# Altium PCB OLD.PcbDoc
Units mm, origin at the board's own origin, x right, y up, seen from the top; angles counter-clockwise.
Board outline 63.6 x 52 mm, 2 copper layers (Top Layer, Bottom Layer); 49 components, 32 nets, 177 pads, 32 vias.
Unrouted connection lines stored in the file: 47.
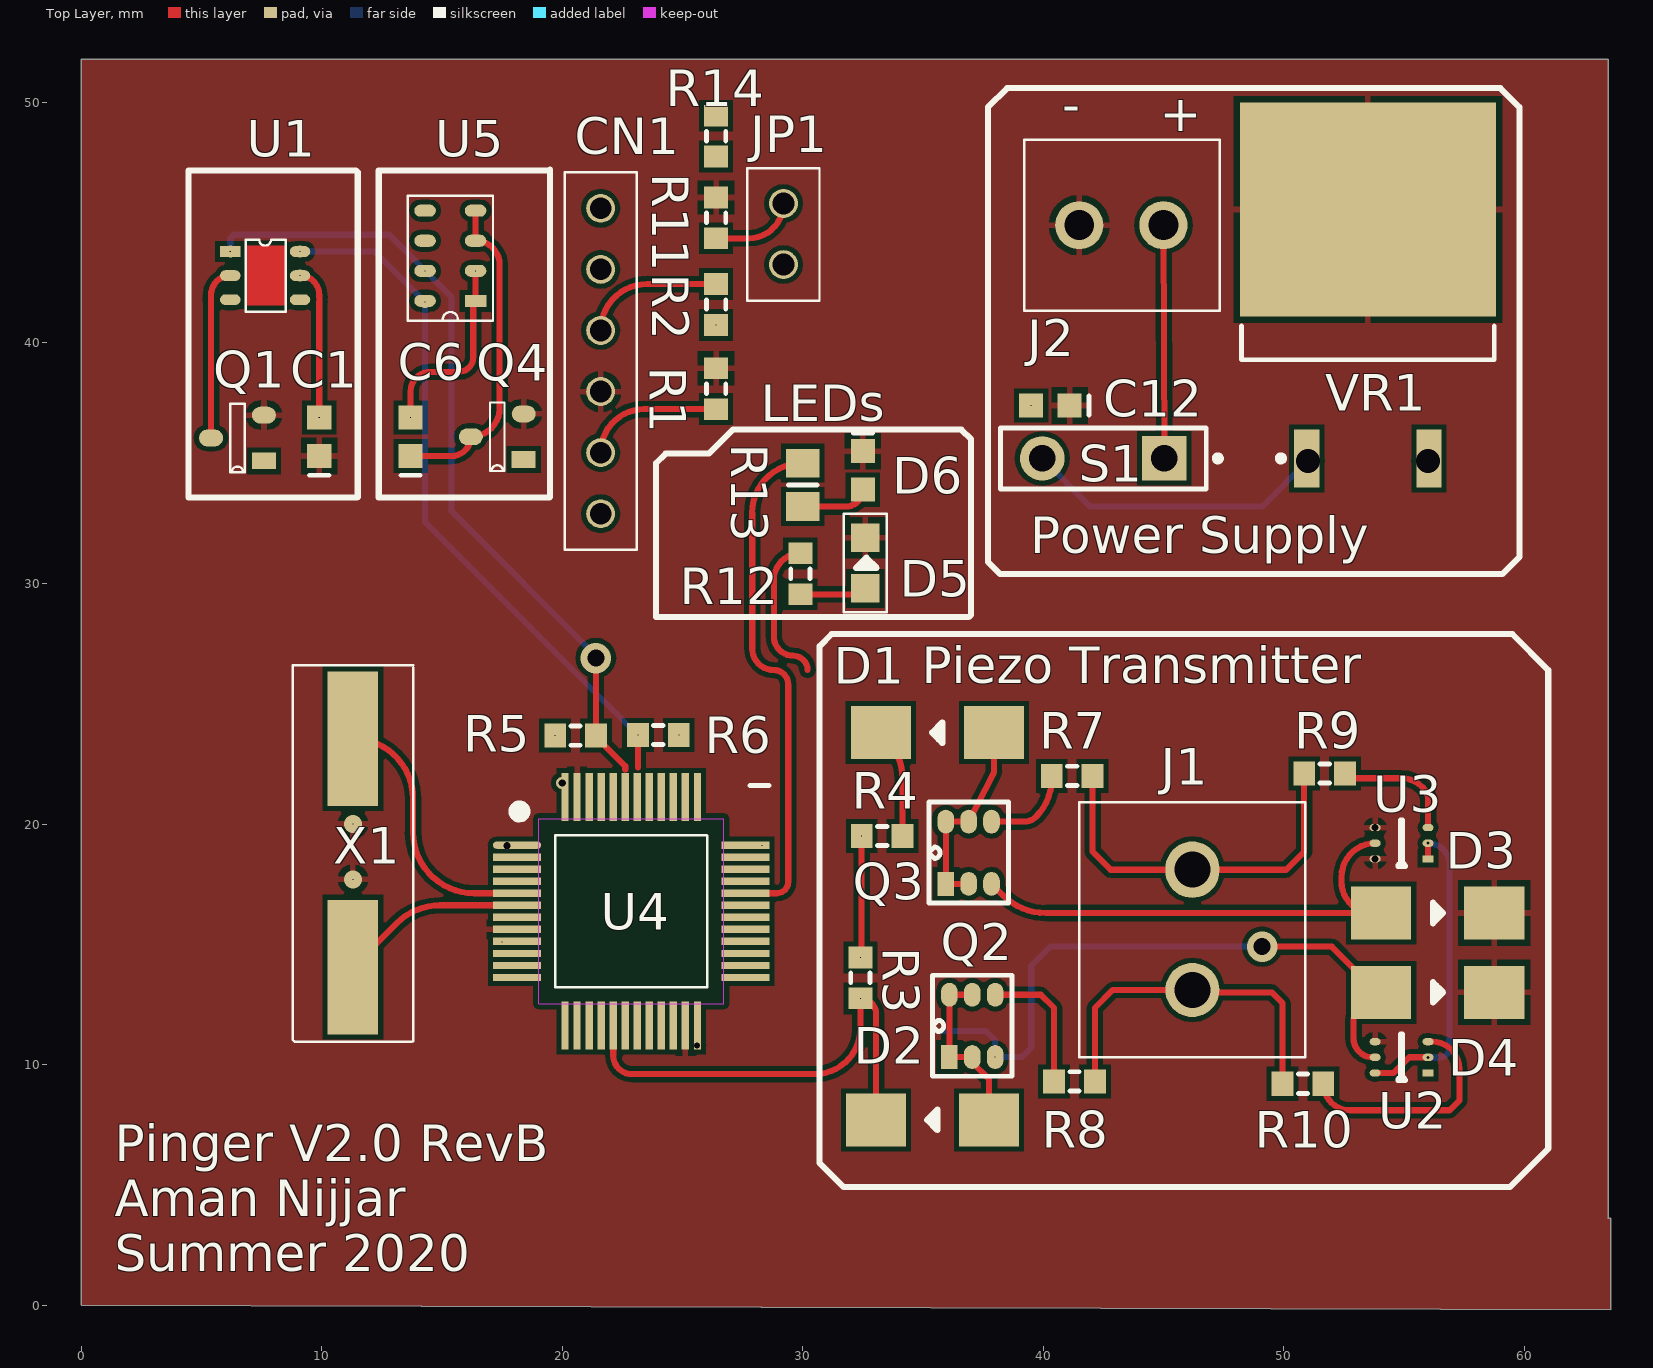
[diagram p0: Top Layer view]
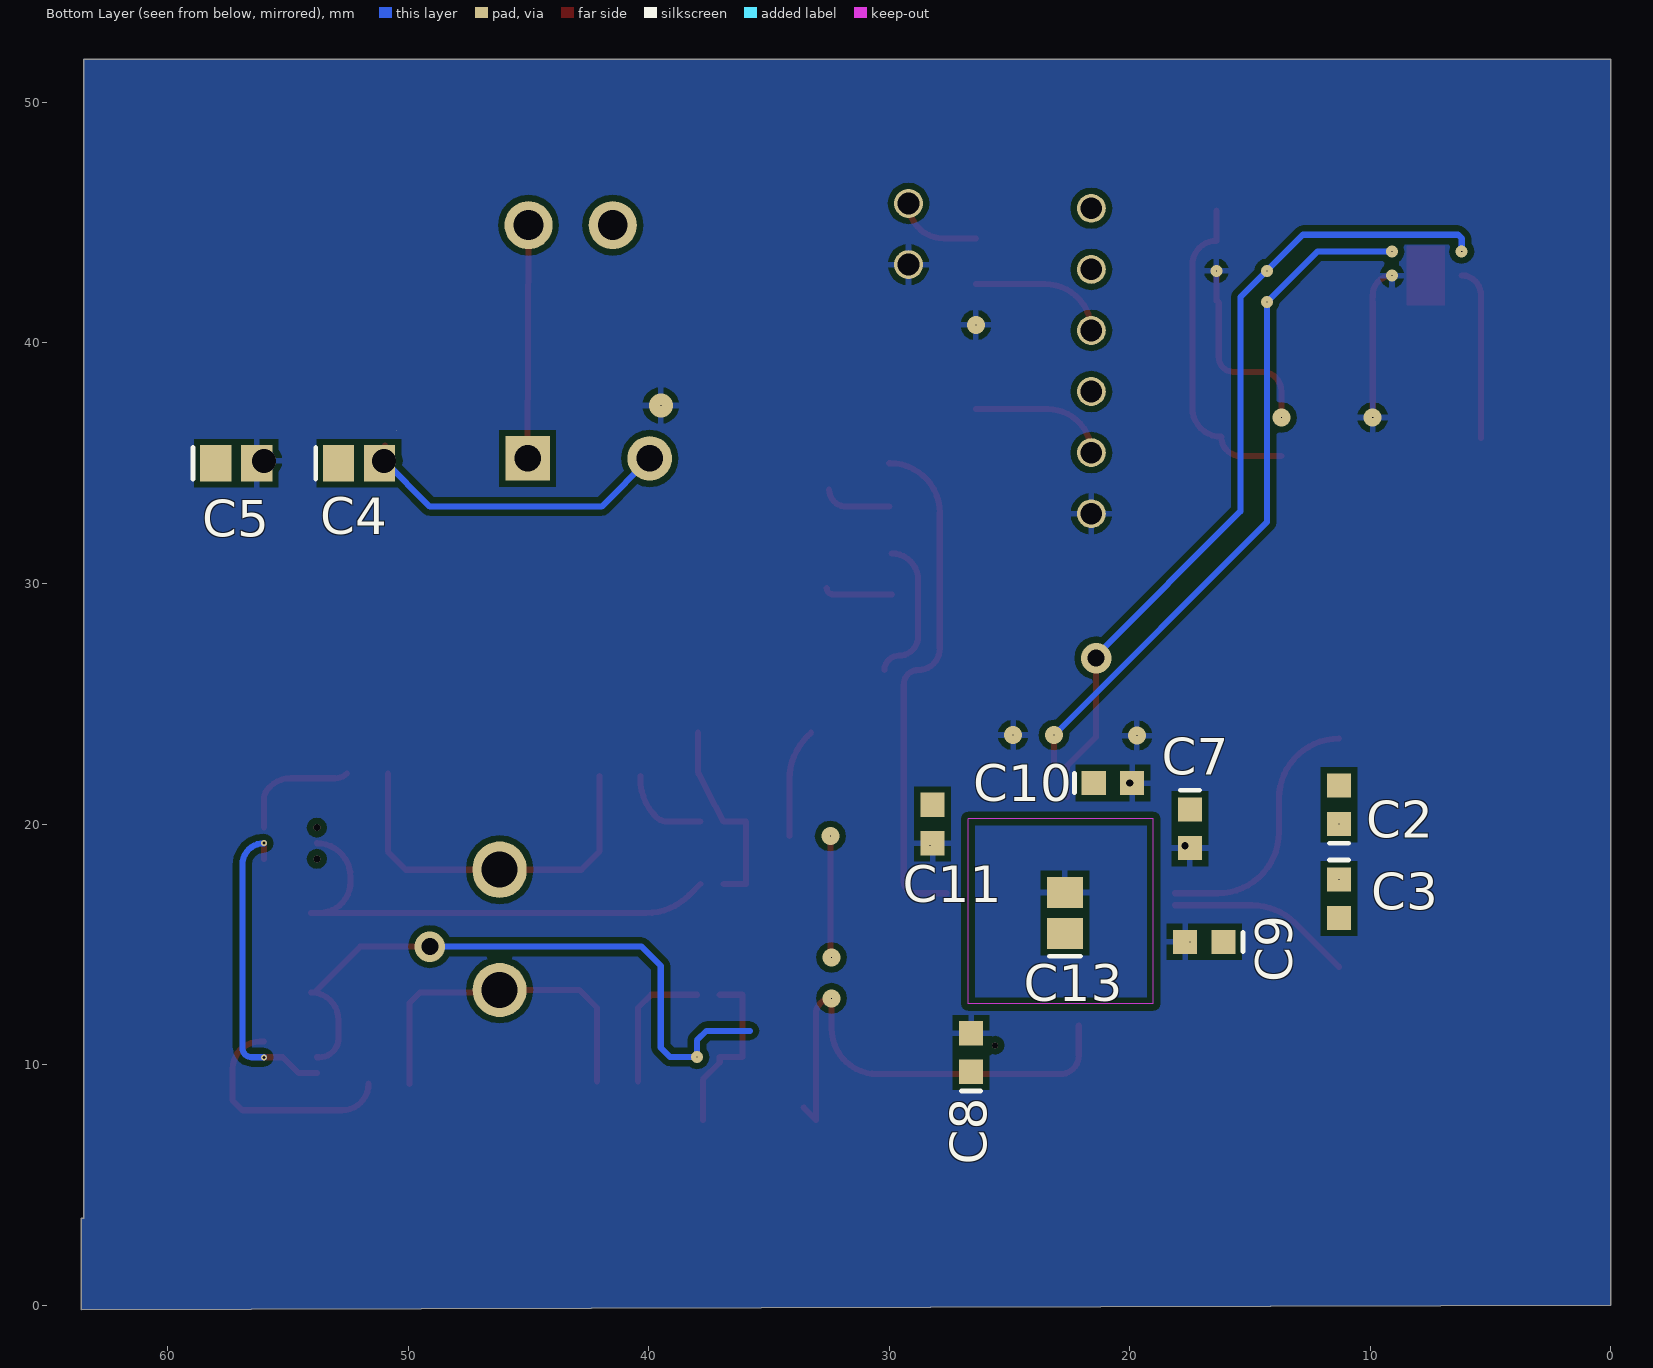
[diagram p1: Bottom Layer view, seen from below]
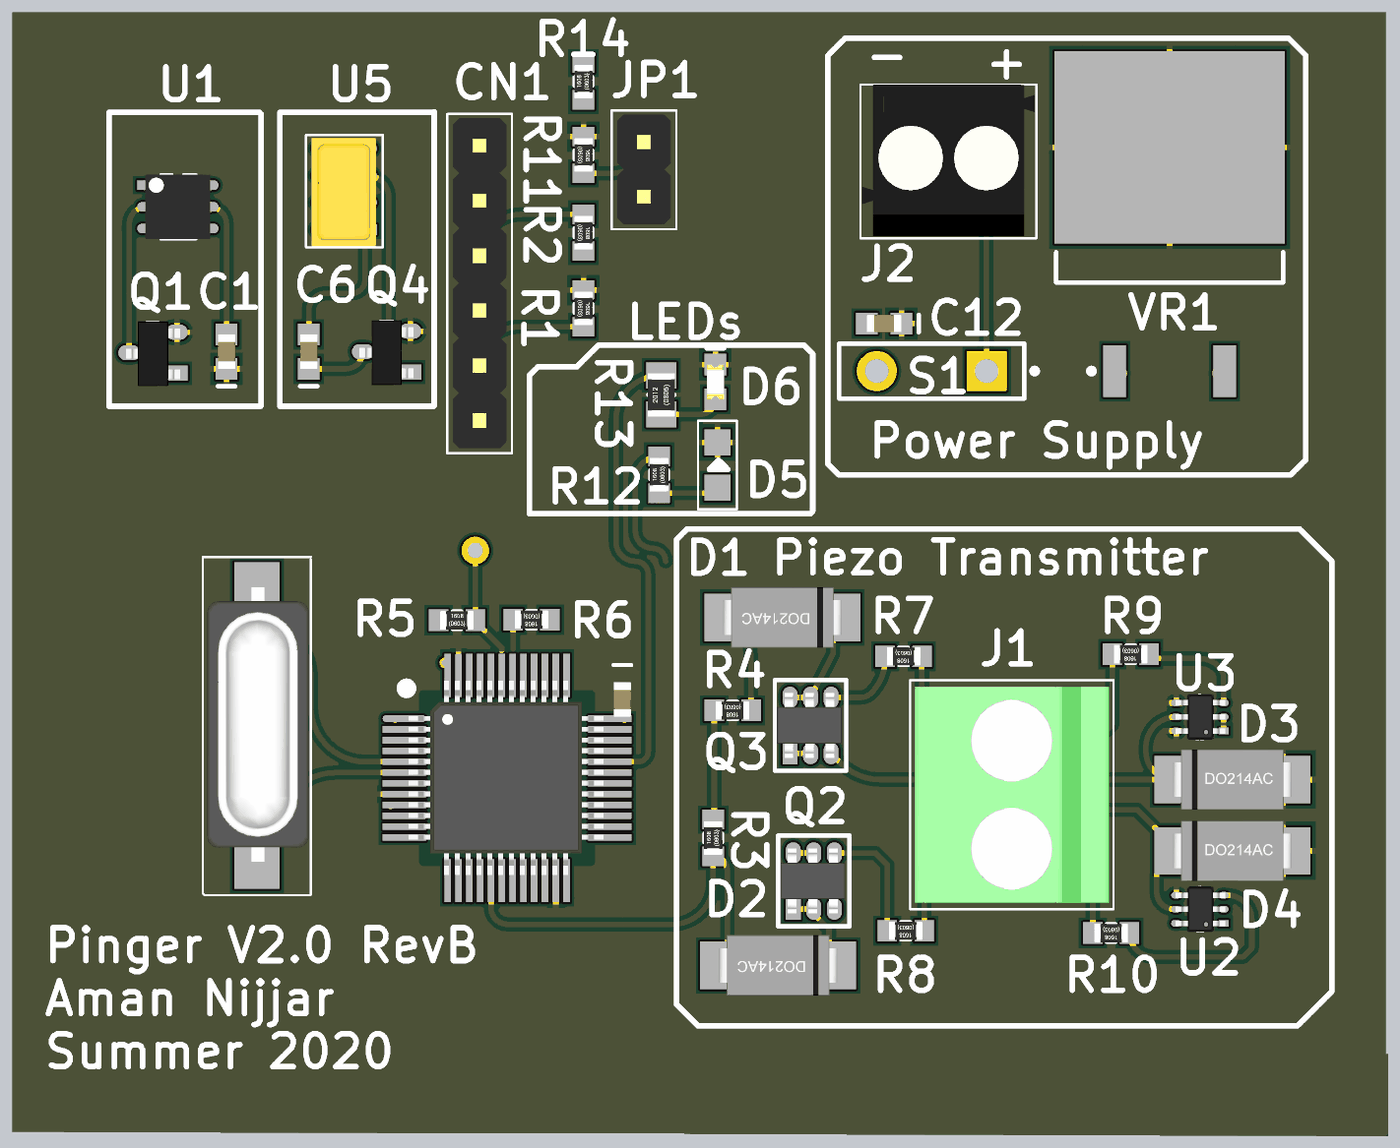
[diagram p2: 3D render of the assembled board from above, using the file's embedded part models]
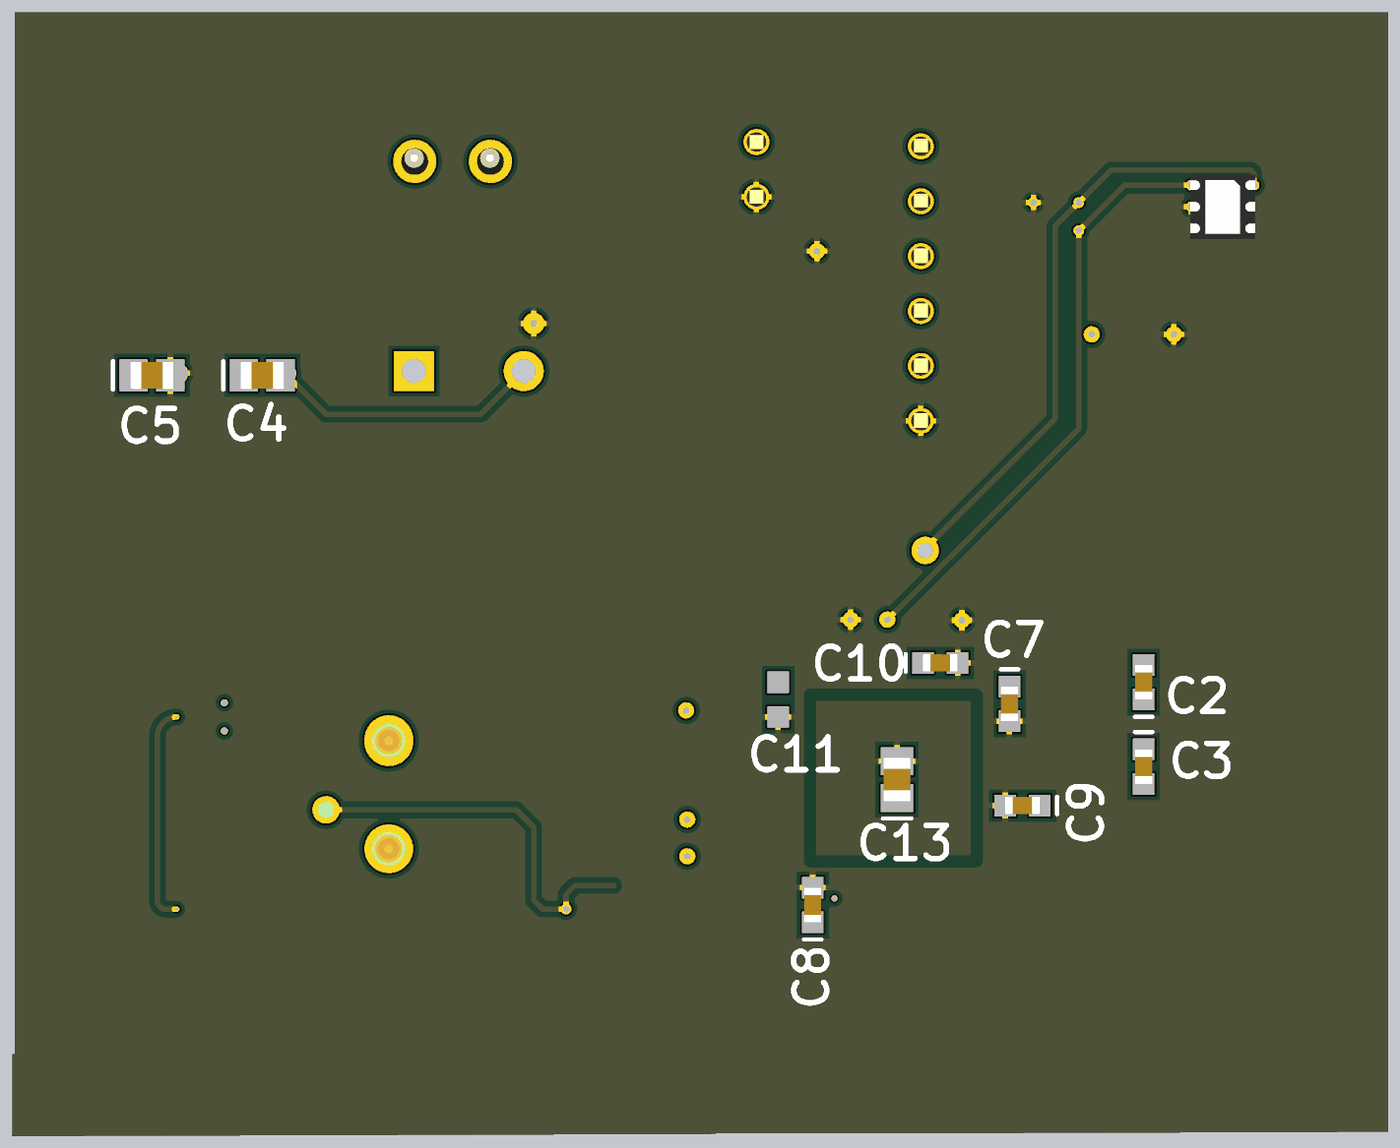
[diagram p3: 3D render of the assembled board from below, using the file's embedded part models]

## Layer stack, top to bottom
Top Solder: solder mask 0.0102, Solder Resist, Dk 3.5
Top Layer: signal copper 0.0356
Dielectric 1: dielectric 0.32, FR-4, Dk 4.8
Bottom Layer: signal copper 0.0356
Bottom Solder: solder mask 0.0102, Solder Resist, Dk 3.5

## Board outline
0,0 0,51.8 63.5,51.8 63.5,3.6 63.6,3.6 63.6,-0.2

## Design rules (kind name [scope] priority, off if disabled: settings)
Clearance Clearance_1 [OnLayer('Top Layer')] p1: gap=0.2 ignorepadtopadclearanceinfootprint=FALSE
Clearance [All] p2: gap=0.254 ignorepadtopadclearanceinfootprint=FALSE except(0: Arc-Hole Track-Hole SMDPad-Hole THPad-Hole Via-Hole Fill-Hole Poly-Hole Region-Hole Text-Hole)
ComponentClearance [All] p1 off: gap=0.254 collisioncheckmode=3 verticalgap=0.254 showdistances=FALSE
PolygonConnect [All] p1: connectstyle=Relief reliefconductorwidth=0.254 reliefentries=4 polygonreliefangle="90 Angle" airgapwidth=0.254
RoutingVias [All] p1: holewidth=0.711 width=1.27 viastyle="Through Hole" minholewidth=0.711 minwidth=1.27 maxholewidth=0.711 maxwidth=1.27
SolderMaskExpansion [All] p1: expansion=0.102 istentingtop=FALSE
UnRoutedNet [All] p1: checkbadconnections=TRUE
ViasUnderSMD [All] p1: allowed=TRUE
Width [All] p1: maxlimit=0.254 minlimit=0.254 preferedwidth=0.254
28 further rules are at their usual default settings.

## Components (designator, comment, footprint, x,y, rotation, side; value= is the part's Value field where it differs from the comment)
C1 "0.1μF" "CAPC1608N(0603\")" 9.9,36.1 r90 top
C2 "30pF" "CAPC1608N(0603\")" 11.3,20.8 r90 bottom
C3 "30pF" "CAPC1608N(0603\")" 11.3,16.9 r270 bottom
C4 "4.7µF" "CAPC2012N(0805\")" 52.05,35 r180 bottom
C5 "4.7µF" "CAPC2012N(0805\")" 57.15,35 r180 bottom
C6 "0.1μF" "CAPC1608N(0603\")" 13.7,36.1 r90 top
C7 "0.1μF" "CAPC1608N(0603\")" 17.5,19.8 r270 bottom
C8 "0.1μF" "CAPC1608N(0603\")" 26.6,10.5 r90 bottom
C9 "0.1μF" "CAPC1608N(0603\")" 16.9,15.1 r0 bottom
C10 "0.1μF" "CAPC1608N(0603\")" 20.7,21.7 r180 bottom
C11 "0.1μF" "CAPC1608N(0603\")" 28.2,20 r270 bottom
C12 "0.1μF" "CAPC1608N(0603\")" 40.3,37.4 r180 top
C13 "4.7µF" "CAPC2012N(0805\")" 22.7,16.3 r90 bottom
CN1 "Header Male 1x6" "Header, Male, 1X6" 21.6,32.9 r90 top
D1 "SMBJ24CA" DO-214AC 35.6,23.8 r180 top
D2 "SMBJ24CA" DO-214AC 35.4,7.7 r180 top
D3 "SMBJ24CA" DO-214AC 56.4,16.3 r0 top
D4 "SMBJ24CA" DO-214AC 56.4,13 r0 top
D5 "Red" LED0805 32.6,30.85 r90 top
D6 "Blue" LED0603 32.5,34.7 r90 top
J1 "2x1 Term Block" "2X1 Terminal Blocks Phoenix Contact 5mm" 46.2,18.1 r270 top
J2 "2x1 Term Block" "2X1 Terminal Blocks" 41.5,44.9 r0 top
JP1 "1X2 Pin Head" "2X1 Males Header" 29.2,43.26 r90 top
Q1 "BC846B,215" SOT-23 7.5,35.1 r180 top
Q2 "SI3443DV" SuperSOT-6 36.1,10.31 r90 top
Q3 "SI3443DV" SuperSOT-6 35.95,17.51 r90 top
Q4 "BC846B,215" SOT-23 18.3,35.15 r180 top
R1 "10k" "RESC1608N(0603\")" 26.4,38.1 r270 top
R2 "10k" "RESC1608N(0603\")" 26.4,41.6 r270 top
R3 "1k" "RESC1608N(0603\")" 32.4,13.6 r90 top
R4 "1k" "RESC1608N(0603\")" 33.3,19.5 r180 top
R5 "3.32k" "RESC1608N(0603\")" 20.554,23.673 r0 top
R6 "3.32k" "RESC1608N(0603\")" 24,23.7 r180 top
R7 "100" "RESC1608N(0603\")" 41.2,22 r180 top
R8 "100" "RESC1608N(0603\")" 41.3,9.3 r180 top
R9 "100" "RESC1608N(0603\")" 51.7,22.1 r180 top
R10 "100" "RESC1608N(0603\")" 50.8,9.2 r180 top
R11 "10k" "RESC1608N(0603\")" 26.4,45.2 r270 top
R12 "715R" "RESC1608N(0603\")" 29.9,30.4 r90 top
R13 "680" "RESC2012N(0805\")" 30,34.1 r90 top
R14 "10k" "RESC1608N(0603\")" 26.4,48.6 r90 top
S1 "SW-SPST" SPST-2 42.5,35.2 r180 top
U1 "I2C Humidity and Temperature Sensor" QFN-6 6.2,43.8 r0 top
U2 "20V/8V" SOT-363 56,9.65 r180 top
U3 "20V/8V" SOT-363 56,18.55 r180 top
U4 "STM32F091CCT6" STM-48LQFP 22.871,16.371 r270 top
U5 "Pressure Sensor" "TE PRESSURE SENSOR (MS560702BA03-50)" 16.4,41.75 r180 top
VR1 "595-UCC283TDTR-3" D2PAK_N 53.5,42 r90 top
X1 "8MHz" HC49/US 11.3,18.8 r90 top

## Footprints (in the part's own frame and the unit in brackets; to place one, negate y for a bottom-side part, rotate by r counter-clockwise, add the part's x,y. Pads: shape width x height; smd on the part's side, far side on the other; paste and mask are expansions set on the pad)
"2X1 Males Header" [mm]
  round 1.2 hole 0.9: 1(0,0) 2(2.54,0)
  silkscreen extent -1.5,-1.5 4,1.5, body extent -1.27,-1.24 3.81,1.25, height 8.54
"2X1 Terminal Blocks" [mm] "ED2740-ND"
  round 2 hole 1.24: 1(0,0) 2(3.5,0)
  silkscreen extent -2.29,-3.56 5.84,3.56, body extent -2.22,-3.44 5.78,3.56, height 8.4
"2X1 Terminal Blocks Phoenix Contact 5mm" [mm]
  oval 2.35x2.25 hole 1.5: 1(0,0)
  round 2.25 hole 1.5: 2(5,0)
  silkscreen extent -2.8,-4.7 7.8,4.7, body extent -2.5,-4.5 7.5,4.5, height 14.05
"CAPC1608N(0603\")" [mm] "Chip Capacitor, Body 1.6x0.8mm (0603\"), IPC Medium Density"
  rect 1x1 smd: 1(-0.8,0) 2(0.8,0)
  silkscreen extent -1.6,-0.4 -1.6,0.4, body extent -0.8,-0.4 0.8,0.4, height 0.9
"CAPC2012N(0805\")" [mm] "Chip Capacitor, Body 2.0x1.3mm (0805\"), IPC Medium Density"
  rect 1.3x1.5 smd: 1(-0.85,0) 2(0.85,0)
  silkscreen extent -1.8,-0.65 -1.8,0.65, body extent -1,-0.62 1,0.63, height 1
D2PAK_N [mm] "D2-PAK, 4-Leads, Body 8.8x10.4mm, Pitch 2.54mm, Lead Span 15.1mm, IPC Medium Density"
  rect 2.4x1.05 smd: 1(-6.8,2.54) 3(-6.8,-2.54)
  rect 8.9x10.65 smd: 2(3.55,0)
  silkscreen extent -6.92,-5.25 -1.3,5.25, body extent -2.7,-5.28 6.3,5.28, height 4.69
DO-214AC [mm]
  rect 2.5x2.2 smd: 1(-2.35,0) 2(2.35,0)
  silkscreen extent -0.2,-0.43 0.22,0.43, body extent -2.74,-1.4 2.74,1.4, height 2.26
HC49/US [mm]
  rect 5.6x2.1 smd: 1(-4.75,0) 2(4.75,0)
  silkscreen extent -7.85,-2.5 7.8,2.5, body extent -6.3,-2.4 6.4,2.3, height 4.2
"Header, Male, 1X6" [mm]
  round 1.2 hole 0.9: 1(0,0) 2(2.54,0) 3(5.08,0) 4(7.62,0) 5(10.16,0) 6(12.7,0)
  silkscreen extent -1.5,-1.5 14.2,1.5, body extent -1.27,-1.24 14,1.25, height 8.54
LED0603 [mm]
  rect 1x1 smd: 1(0.8,0) 2(-0.8,0)
  silkscreen extent 1.55,-0.4 1.55,0.4, body extent -0.8,-0.4 0.8,0.4, height 0.69
LED0805 [mm]
  rect 1.2x1.2 smd: 1(1.05,0) 2(-1.05,0)
  silkscreen extent -2.05,-0.9 2.05,0.9
QFN-6 [mm]
  rect 0.85x0.45 smd: 1(0,0)
  oval 0.85x0.45 smd: 2(0,-1) 3(0,-2) 4(2.9,-2) 5(2.9,-1) 6(2.9,0)
  Top Layer region: 0.7,-2.25 2.3,-2.25 2.3,0.25 0.7,0.25
  silkscreen extent 0.65,-2.5 2.3,0.5, body extent -0.05,-2.5 2.95,0.5, height 0.05
"RESC1608N(0603\")" [mm] "Chip Resistor, Body 1.6x0.8mm (0603\"), IPC Medium Density"
  rect 0.9x1 smd: 1(-0.85,0) 2(0.85,0)
  silkscreen extent -0.2,-0.4 0.2,0.4, body extent -0.77,-0.42 0.78,0.43, height 0.44
"RESC2012N(0805\")" [mm] "Chip Resistor, Body 2.0x1.3mm (0805\"), IPC Medium Density"
  rect 1.2x1.4 smd: 1(-0.9,0) 2(0.9,0)
  silkscreen extent 0,-0.6 0,0.6, body extent -1,-0.62 1,0.63, height 0.45
SOT-23 [mm]
  rect 1x0.7 smd: 1(-0.1,0)
  oval 1x0.7 smd: 2(-0.1,-1.9) 3(2.1,-0.95)
  silkscreen extent 0.7,-2.37 1.3,0.48, body extent -0.25,-2.4 2.25,0.6, height 1.06
SOT-363 [mm]
  rect 0.45x0.3 smd: 1(0,0)
  oval 0.45x0.3 smd: 2(0,-0.65) 3(0,-1.3) 4(2.2,-1.3) 5(2.2,-0.65) 6(2.2,0)
  silkscreen extent 0.94,-1.63 1.26,0.33, body extent -0.07,-1.7 2.23,0.4, height 1
SPST-2 [mm] "Switch; 2 Leads"
  rect 1.85x1.85 hole 1.1: 1(-2.54,0)
  round 1.85 hole 1.1: 2(2.54,0)
  silkscreen extent -4.89,-1.27 4.28,1.27
STM-48LQFP [mm]
  oval 0.3x2 smd: 1(-2.75,-4.75)
  rect 0.3x2 smd: 2(-2.25,-4.75) 3(-1.75,-4.75) 4(-1.25,-4.75) 5(-0.75,-4.75) 6(-0.25,-4.75) 7(0.25,-4.75) 8(0.75,-4.75) 9(1.25,-4.75) 10(1.75,-4.75) 11(2.25,-4.75) 12(2.75,-4.75) 25(2.75,4.75) 26(2.25,4.75) 27(1.75,4.75) 28(1.25,4.75) 29(0.75,4.75) 30(0.25,4.75) 31(-0.25,4.75) 32(-0.75,4.75) 33(-1.25,4.75) 34(-1.75,4.75) 35(-2.25,4.75) 36(-2.75,4.75)
  rect 2x0.3 smd: 13(4.75,-2.75) 14(4.75,-2.25) 15(4.75,-1.75) 16(4.75,-1.25) 17(4.75,-0.75) 18(4.75,-0.25) 19(4.75,0.25) 20(4.75,0.75) 21(4.75,1.25) 22(4.75,1.75) 23(4.75,2.25) 24(4.75,2.75) 37(-4.75,2.75) 38(-4.75,2.25) 39(-4.75,1.75) 40(-4.75,1.25) 41(-4.75,0.75) 42(-4.75,0.25) 43(-4.75,-0.25) 44(-4.75,-0.75) 45(-4.75,-1.25) 46(-4.75,-1.75) 47(-4.75,-2.25) 48(-4.75,-2.75)
  Keep-Out Layer lines w0.05: 3.85,-3.85 -3.85,-3.85 -3.85,3.85 3.85,3.85 3.85,-3.85
  silkscreen extent -4.36,-4.86 3.16,3.16, body extent -4.51,-4.55 4.49,4.45, height 1.56
SuperSOT-6 [mm]
  rect 0.99x0.69 smd: 1(0,0)
  oval 0.99x0.69 smd: 1(0,-0.95) 1(2.59,-0.95) 1(2.59,0) 3(0,-1.9) 4(2.59,-1.9)
  silkscreen extent -0.8,-2.6 3.4,0.7, body extent -0.2,-2.4 2.8,0.6, height 1.05
"TE PRESSURE SENSOR (MS560702BA03-50)" [mm]
  rect 0.9x0.5 smd: 1(0,0)
  oval 0.9x0.5 smd: 2(0,-1.25) 3(0,-2.5) 4(0,-3.75) 5(2.1,-3.75) 6(2.1,-2.5) 7(2.1,-1.25) 8(2.1,0)
  silkscreen extent -0.72,-4.37 2.83,0.83, body extent -0.42,-4.22 2.58,0.78, height 0.95

## Part data
C1 C6 C7 C8 C9 C10 C11 C12: library part "0.1uF 100V 0603 SMD, Ceramic", "Capacitor, Ceramic, 100V, +/- 10%, 0603 SMD, X7R", Supplier Part Number 1=445-6938-1-ND, Created By="Ashwin Sira", MFG=TDK, MFG#=CGA3E3X7S2A104K080AB, PackageDescription="Chip Capacitor", Published=16-04-26, Publisher=AUVic, Supplier 1=Digi-Key
C2 C3: library part "30pF 50V 0603 SMD, Ceramic", "Capacitor, Ceramic, 50V, +/-1%, 0603 SMD, C0G", Supplier Part Number 1=1276-2259-1-ND, Made By="Andy Bates", PackageDescription="Chip Capacitor", Published=16-09-12, Publisher=AUVic, Supplier 1=Digi-Key
C4 C5 C13: library part "4.7uF 35V 0805 SMD, Ceramic", "Capacitor, Ceramic, 35V, +/- 10%, 0805 SMD, X5R", Supplier Part Number 1=1276-6722-1-ND, Made By="Andy Bates", PackageDescription="Chip Capacitor", Published=16-11-12, Publisher=AUVic, Supplier 1=Digi-Key
CN1: library part "Header, Male, 1x6", "1x6, Pads Pitch: 0.1\" (2.54mm), Through hole", Supplier 1 Part Number=952-2270-ND, Made Bates="Andy Bates", Supplier 1=Digikey
D1 D2 D3 D4: "TVS DIODE 24VWM 38.9VC SMB", Capacitance @ Frequency=-, Current - Peak Pulse (10/1000µs)=15.4A, Manufacturer="Fairchild Semiconductor", Operating Temperature="-55°C ~ 150°C (TJ)", Package / Case="DO-214AA, SMB", Power - Peak Pulse=600W, Power Line Protection=No, Supplier Device Package="DO-214AA (SMB)", Supplier Part Number 1=SMBJ24CAFSCT-ND, Voltage - Breakdown (Min)=26.7V, Voltage - Clamping (Max) @ Ipp=38.9V, Voltage - Reverse Standoff (Typ)=24V, Applications="General Purpose", Bidirectional Channels=1, Category="Circuit Protection", ComponentLink1Description=http://www.fairchildsemi.com/datasheets/SM/SMBJ100A.pdf, ComponentLink1URL=http://www.fairchildsemi.com/datasheets/SM/SMBJ100A.pdf, Manufacturer Part Number=SMBJ24CA, Mounting Type="Surface Mount", Packaging="Cut Tape (CT)", Pricing 1="1=0.58, 10=0.411, 25=0.3372, 100=0.2695, 250=0.19636, 500=0.15946, 1000=0.12257 (USD)", RoHS="RoHS Compliant", Stock 1=31873, Supplier 1=Digi-Key, Type=Zener, Unidirectional Channels=-
D5: library part "LED, 0805 (2012), Green, Clear", "LED, 0805 (2012), Green, Clear", Supplier Part Number 1=475-1410-1-ND, Colour=Red, Created By="Andy Bates", Supplier 1=Digi-Key
D6: library part "LED, 0603 (1608), Blue, Clear", "LED, 0603 (1608), Blue, Clear", Supplier Part Number 1=475-2816-6-ND, Colour=Blue, Created By="Lyden Smith", Date Created=2017-09-19, Supplier 1=Digi-Key
J1: library part "2x1 Terminal Block, 20A, 12-20AWG", Supplier Part Number 1=277-6405-ND, Date Made=2017-11-14, Made By="Andy Bates", Supplier 1=Digi-Key
J2: library part "2x1 Terminal Block", Supplier Part Number 1=ED2740-ND, Made By="Andy Bates", Supplier 1=Digikey
JP1: library part "1x2 Male Header", Supplier Part Number 1=952-3073-ND, Made By="Andy Bates", Supplier 1=Digikey
Q1 Q4: "NPN 65V 100mA 250mW", Supplier Part Number 1=568-1632-1-ND, DatasheetVersion=1997, LatestRevisionDate=09-Sep-2016, Published=8-Jun-2000, Publisher="Andy Bates", Supplier 1=Digi-Key
Q2 Q3: library part SI3443DVFSTR-ND, "P-Channel 20V 4A (Ta) 1.6W (Ta) Surface Mount SuperSOT™-6", ComponentLink1Description=Datasheet, ComponentLink1URL=*https://www.onsemi.com/pub/Collateral/SI3443DV-D.PDF, Supplier 1=Digi-Key
R1 R2 R11 R14: library part "10kR, 1%, 1/10W, 0603 SMD", "10kR, 1%, 1/10W, 0603 SMD", Supplier Part Number 1=311-10.0KHRCT-ND, Created On=14-05-31, Last Edited=14-05-31, Made By="Ashwin Sira", Owned By=AUVic, Supplier 1=Digi-Key
R3 R4: library part "1kR, 1%, 1/10W , 0603, SMD", "1kR, 1%, 1/10W , 0603, SMD", Supplier Part Number 1=311-1.00KHRCT-ND, Created By="Andy Bates", Date Created=2017-05-10, Publisher=AUVic, Supplier 1=Digikey
R5 R6: library part "3.32k, 1%, 1/10W, 0603, SMD", "3.32k, 1%, 1/10W, 0603, SMD", Supplier Part Number 1=RMCF0603FT3K32CT-ND, Created By="Ashwin Sira", Date Created=2016-06-25, Publisher=AUVic, Supplier 1=Digi-Key
R7 R8 R9 R10: library part "100R, 1%, 1/10W, 0603 SMD", "100R, 1%, 1/10W, 0603 SMD", Supplier Part Number 1=311-100HRCT-ND, Created On=16-09-10, Last Edited=16-09-10, Made By="Andy Bates", Owned By=AUVic, Supplier 1=Digi-Key
R12: library part "715R, 1%, 1/10W, 0603, SMD", "715R, 1%, 1/10W, 0603, SMD", Supplier Part Number 1=541-715HCT-ND, Created By="Ashwin Sira", Date Created=2016-06-10, Publisher=AUVic, Supplier 1=Digi-Key
R13: library part "680, 5%, 1/8W, 0805 SMD", "680, 5%, 1/8W, 0805 SMD", Supplier Part Number 1=RMCF0805JT680RCT-ND, Created By="Lyden Smith", Created On=2017-06-04, Supplier 1=Digi-Key
S1: "Single-Pole, Single-Throw Switch", LatestRevisionDate=17-Jul-2002, LatestRevisionNote="Re-released for DXP Platform.", PackageDescription="Switch; 2 Leads", PackageReference=SPST-2, Published=24-Mar-1999, Publisher="Altium Limited"
U1: library part Si700XX, Supplier Part Number 1=336-3140-5-ND, Created On=2019/09/08, Made By="Andy Bates", Supplier 1=Digi-Key
U2 U3: library part NTJD4105CT1GOSTR-ND, "Mosfet Array N and P-Channel 20V, 8V 630mA, 775mA 270mW Surface Mount SC-88/SC70-6/SOT-363", Supplier Part Number 1=NTJD4105CT1GOSCT-ND, ComponentLink1Description=Datasheet, ComponentLink1URL=https://www.onsemi.com/pub/Collateral/NTJD4105C-D.PDF, Supplier 1=Digi-Key
U4: "LQFP48 Chip", Digikey Number=497-15166-ND, Made By="Andy Bates", Supplier 1=Digikey
U5: library part "MS560702BA03-50 Pressure Sensor", "1kPa to 120 kPa", Supplier Part Number 1=223-1198-6-ND, Created On=2017-09-11, Made By="Andy Bates", Supplier 1=Digi-Key
VR1: library part "Volt Reg", "Voltage Regulator", LatestRevisionDate=29-May-2009, LatestRevisionNote="IPC-7351 Footprint Added.", PackageDescription="3-Pin Transistor Outline Package 2.54 mm Pitch, 15.1 mm Lead Span", PackageReference=D2PAK, Published=24-Mar-1999, Publisher="Altium Limited"
X1: library part "Oscillator 8MHz 40ESR", "8Mhz 40ESR  16pF -20°C ~ 70°C", Supplier Part Number 1=GC0800044CT-ND, Date Made=2017-09-18, Made By="Lyden Smith", Supplier 1=Digi-Key

## Via types
v1: diameter 0.75, hole 0, Top Layer to Bottom Layer, 11 vias
v2: diameter 0.5, hole 0, Top Layer to Bottom Layer, 7 vias
v3: diameter 0.3, hole 0.3, Top Layer to Bottom Layer, 3 vias
v4: diameter 0.25, hole 0, Top Layer to Bottom Layer, 2 vias
v5: diameter 1.27, hole 0.711, Top Layer to Bottom Layer, 2 vias
v6: diameter 0.25, hole 0.125, Top Layer to Bottom Layer, 2 vias
v7: diameter 1, hole 1, Top Layer to Bottom Layer, 2 vias
v8: diameter 0.25, hole 0.25, Top Layer to Bottom Layer, 1 vias
v9: diameter 0.5, hole 0.3, Top Layer to Bottom Layer, 1 vias
v10: diameter 1, hole 0, Top Layer to Bottom Layer, 1 vias

## Nets (pads, with @x,y where several pads share a name; then routed paths per layer and width w, separated by ;. In a path a pad name is that pad's centre, name@x,y a point inside that pad or via, vN(x,y) a via of type N, cw(c..) or ccw(c..) an arc to the next point about the centre after c; other vN are vias at no path point)
3V3: C1.2 C5.2 C6.2 C7.2 C8.2 C9.2 C10.2 C11.2 C12.2 C13.2 CN1.1 JP1.1 R2.2 R5.1 R6.1 R14.2 U1.5 U4.1 U4.9 U4.24 U4.36 U4.48 U5.1 U5.2 VR1.3 | length 14.5
  Top Layer w0.254: v2(9.1,42.8) cw(c9.1,42) 9.9,42 9.9,41.901 ccw(c10.154,41.901) 9.902,41.871 cw(c9.3,41.8) 9.902,41.729 ccw(c10.154,41.699) 9.9,41.699 v1(9.9,36.9) ; C6.2 13.7,38 cw(c14.5,38) 14.5,38.8 15.7,38.8 ccw(c15.7,39.4) 16.3,39.4 16.3,41.65 cw(c16.4,41.65) U5.1 v2(16.4,43)
  other v1: 19.704,23.673 24.85,23.7 26.4,40.75
  other v3: 17.7,19.1
  other v4: 17.5,15.1 28.3,19.1
  other v7: 56,35.1
  other v9: 20,21.7
  other v10: 39.5,37.4
BLUE: R13.2 U4.32 | length 21.5
  Top Layer w0.254: U4.32 28.921,17.121 ccw(c28.921,17.6) 29.4,17.6 29.4,25.8 ccw(c28.8,25.8) 28.8,26.4 cw(c28.8,27.3) 27.9,27.3 27.9,32.936 cw(c29.964,32.936) 29.964,35 R13.2
BOOT: JP1.2 R11.2 U4.44 | length 3.6
  Top Layer w0.254: R11.2 27.75,44.35 ccw(c27.75,45.8) JP1.2
GND: C1.1 C2.1 C3.1 C4.1 C5.1 C7.1 C8.1 C9.1 C10.1 C11.1 C12.1 C13.1 CN1.3 D3.2 D4.2 D5.1 D6.1 J2.1 Q1.2 Q4.2 R1.1 R11.1 U2.4 U3.4 U3.6 U4.8 U4.23 U4.47 VR1.2
  other v1: 11.3,17.7 11.3,20
  other v3: 53.8,18.55 53.8,19.85
  other v8: 25.6,10.8
GREEN: R12.2 U4.31 | length 6.3
  Top Layer w0.254: R12.2 ccw(c29.9,30.15) 28.8,30.15 28.8,27.8 ccw(c29.6,27.8) 29.6,27 cw(c29.6,26.4) 30.2,26.4
H_and_T: Q1.1 U4.30
I2C1_SCL: R6.2 U1.6 U4.42 U5.8 | length 29.1
  Top Layer w0.254: 23.15,22.35 v1(23.15,23.7)
  Bottom Layer w0.254: v2(9.1,43.8) 12.2,43.8 v2(14.3,41.7) 14.3,32.55 v1(23.15,23.7)
I2C1_SDA: R5.2 U1.1 U4.43 U5.7 | length 33.8
  Top Layer w0.254: v5(21.4,26.9) 21.4,23.677 R5.2 21.404,23.623 22.621,22.406 22.621,22.271 ; U4.43 22.621,21.377 ccw(c22.367,21.377) U4.43@22.62,21.393
  Bottom Layer w0.254: v2(6.2,43.8) 6.2,44.351 6.349,44.5 12.8,44.5 v2(14.3,43) 15.4,41.9 15.4,33 21.4,27 v5(21.4,26.9)
NetC4_2: C4.2 S1.2 VR1.1 | length 13.2
  Top Layer w0.254: VR1.1 VR1.1@50.96,35.73
  Bottom Layer w0.254: S1.2 41.96,33.2 49.1,33.2 v7(51,35.1)
NetC6_1: C6.1 Q4.3 U5.3 U5.4 | length 13.6
  Top Layer w0.254: C6.1 15.4,35.3 ccw(c15.4,36.1) Q4.3 ccw(c16.2,37.3) 17.4,37.3 17.4,43.25 ccw(c16.4,43.25) U5.3 U5.4
NetD1_1: D1.1 Q3.1 | length 8.4
  Top Layer w0.254: Q3.1@36.9,17.51 35.95,17.51 35.95,20.1 36.9,20.1 37.922,22.085 ccw(c37.696,22.202) 37.95,22.202 D1.1
NetD2_1: D2.1 Q2.1 | length 7.4
  Top Layer w0.254: Q2.1@37.05,12.9 36.1,12.9 36.1,10.31 37.05,10.31 37.05,10.083 37.75,9.383 D2.1
NetD5_2: D5.2 R12.1 | length 2.8
  Top Layer w0.254: R12.1 32.35,29.55 ccw(c32.35,29.8) D5.2
NetD6_2: D6.2 R13.1 | length 2.9
  Top Layer w0.254: R13.1 31.8,33.2 ccw(c31.8,33.9) D6.2
NetJ1_1: J1.1 R7.1 R9.2 | length 15.8
  Top Layer w0.254: R7.1 42.05,18.85 42.8,18.1 J1.1 50.1,18.1 50.85,18.85 R9.2
NetJ1_2: J1.2 R8.1 R10.2 | length 14.7
  Top Layer w0.254: R8.1 42.15,12.35 42.9,13.1 J1.2 46.3,13 49.5,13 49.95,12.55 R10.2
NetQ1_3: Q1.3 U1.2 | length 7.4
  Top Layer w0.254: Q1.3 5.4,41.697 ccw(c5.146,41.699) 5.398,41.729 cw(c6,41.8) 5.398,41.871 ccw(c5.146,41.901) 5.4,41.903 5.4,42 cw(c6.2,42) U1.2 U1.2@6,42.8
NetQ2_4: Q2.4 R8.2 | length 5.7
  Top Layer w0.254: Q2.4 39.9,12.9 40.45,12.35 R8.2
NetQ3_4: Q3.4 R7.2 | length 3.8
  Top Layer w0.254: Q3.4 39.217,20.1 ccw(c39.217,20.783) 39.7,20.3 ccw(c38.131,21.869) 40.35,21.869 R7.2
NetR9_1: R9.1 U3.3 | length 5.1
  Top Layer w0.254: R9.1 ccw(c53.033,22.583) 53.033,21.9 54.9,21.9 cw(c54.9,20.693) 55.754,21.546 55.8,21.5 cw(c55.317,21.017) 56,21.017 U3.3
NetR10_1: R10.1 U2.3 | length 9.8
  Top Layer w0.254: R10.1@51.65,9.15 R10.1 ccw(c52.75,9.2) 52.75,8.1 56.9,8.1 57.3,8.5 57.3,9.826 ccw(c56.176,9.826) 56.176,10.95 U2.3
NetU2_2: U2.2 U2.6 U3.1 U3.2 | length 13.3
  Top Layer w0.254: U2.6 54.571,9.65 55.221,10.3 v6(56,10.3) ; U3.1 v6(56,19.2)
  Bottom Layer w0.254: v6(56,10.3) 56.51,10.3 ccw(c56.5,10.7) 56.9,10.7 56.9,18.3 ccw(c56,18.3) v6(56,19.2)
NRST: CN1.5 U4.7
OSC_IN: U4.5 X1.2 | length 11.1
  Top Layer w0.254: X1.2 cw(c11.3,21.05) 13.8,21.05 13.8,19.661 ccw(c16.34,19.661) 16.34,17.121 U4.5
OSC_OUT: U4.6 X1.1 | length 7.8
  Top Layer w0.254: X1.1@11.3,14.081 X1.1 13.127,15.877 cw(c14.923,14.081) 14.923,16.621 U4.6
PRSURE: Q4.1 U4.33
PWM_N: D1.2 D3.1 Q3.3 R4.1 U3.5 U4.29 | length 25.6
  Top Layer w0.254: D1.2 33.406,23.644 cw(c31.61,21.848) 34.15,21.848 R4.1 ; Q3.3 38.316,17.044 ccw(c40.112,18.84) 40.112,16.3 D3.1@53.7,16.3 ; U3.5 ccw(c53.8,17.8) 52.4,17.8 52.4,17.6 ccw(c53.7,17.6) D3.1@53.7,16.3 ; D3.1 D3.1@53.7,16.3
PWM_P: D2.2 D4.1 Q2.3 R3.1 U2.5 U4.17 | length 48
  Top Layer w0.254: U4.17 22.121,10.379 ccw(c22.9,10.379) 22.9,9.6 30.5,9.6 ccw(c30.5,11.5) 32.4,11.5 v1(32.4,12.75) cw(c32.4,12.1) 33.05,12.1 D2.2 D2.2@33.556,8.206 ; v5(49.1,14.9) 52,14.9 53.908,12.992 D4.1@53.913,12.992 ; U2.5 53.7,10.3 cw(c53.7,11.1) 52.9,11.1 52.9,11.85 cw(c54.05,11.85) D4.1@53.913,12.992 ; D4.1 ccw(c54.05,11.85) D4.1@53.913,12.992
  Bottom Layer w0.254: 35.8,11.4 37.6,11.4 38,11 v2(38,10.31) 39.11,10.31 39.5,10.7 39.5,14.1 40.3,14.9 v5(49.1,14.9)
SWCLK: CN1.2 R1.2 U4.37 | length 5.8
  Top Layer w0.254: CN1.2 cw(c23.41,35.44) 23.41,37.25 R1.2
SWDIO: CN1.4 R2.1 U4.34 | length 5.9
  Top Layer w0.254: CN1.4 cw(c23.53,40.52) 23.53,42.45 R2.1
SWO: CN1.6 R14.1 U4.39
VCC: J2.2 R3.2 R4.2 S1.1 | length 15
  Top Layer w0.254: v1(32.4,14.45) ccw(c32.4,14.5) 32.45,14.5 v1(32.45,19.5) R4.2@32.6,19.35 ; J2.2 S1.1
pads on no net: C2.2 C3.2 U1.3 U1.4 U2.1 U4.2 U4.3 U4.4 U4.10 U4.11 U4.12 U4.13 U4.14 U4.15 U4.16 U4.18 U4.19 U4.20 U4.21 U4.22 U4.25 U4.26 U4.27 U4.28 U4.35 U4.38 U4.40 U4.41 U4.45 U4.46 U5.5 U5.6
copper on no net:
  other v1: 13.7,36.9

## Polygon pours and split planes (outlines as drawn)
3V3 on Bottom Layer "3V3" (solid, remove dead copper, pour order 0): 0,0 0,51.8 63.5,51.8 63.5,3.6 63.6,3.6 63.6,-0.2
GND on Top Layer "GND" (solid, remove dead copper, pour order 1): 0,0 0,51.8 63.5,51.8 63.5,3.6 63.6,3.6 63.6,-0.2

## Keep-outs
Keep-Out Layer:
  region: 50.471,36.371

## Silkscreen, mask and mechanical layers (free items; w line width, h text height)
Top Overlay:
  lines w0.254: 12.371,33.571 19.471,33.571 19.5,33.6 19.5,47.2 19.471,47.171 12.371,47.171 12.371,46.671 12.371,33.571 ; 12.371,33.571 12.371,33.571 ; 4.471,33.571 11.471,33.571 11.5,33.6 11.5,47.1 11.429,47.171 4.471,47.171 4.471,33.571 ; 23.9,28.6 23.9,35 24.3,35.4 26.1,35.4 27.1,36.4 36.6,36.4 37,36 37,28.7 36.9,28.6 23.9,28.6 ; 30.7,5.9 31.7,4.9 59.4,4.9 61,6.5 61,26.4 59.5,27.9 31.2,27.9 30.7,27.4 30.7,5.9 ; 37.7,30.9 38.2,30.4 59.1,30.4 59.8,31.1 59.8,49.8 59,50.6 38.5,50.6 37.7,49.8 37.7,49.2 37.7,30.9
  text "-" at 41.546,50.308 h1.52 r180
  text "+" at 44.854,48.8 h1.52
  text "LEDs" at 28.254,36.754 h1.52
  text "Power Supply" at 39.454,31.262 h1.52
  text "Piezo Transmitter" at 34.954,25.854 h1.52
  text "Pinger V2.0 RevB / Aman Nijjar / Summer 2020" at 1.4,1.4 h1.52